# Altium PCB PCBEj4.PcbDoc
Units mm, origin at the board's own origin, x right, y up, seen from the top; angles counter-clockwise.
Board outline 50 x 50 mm, 2 copper layers (Top Layer, Bottom Layer); 14 components, 13 nets, 52 pads, 0 vias.
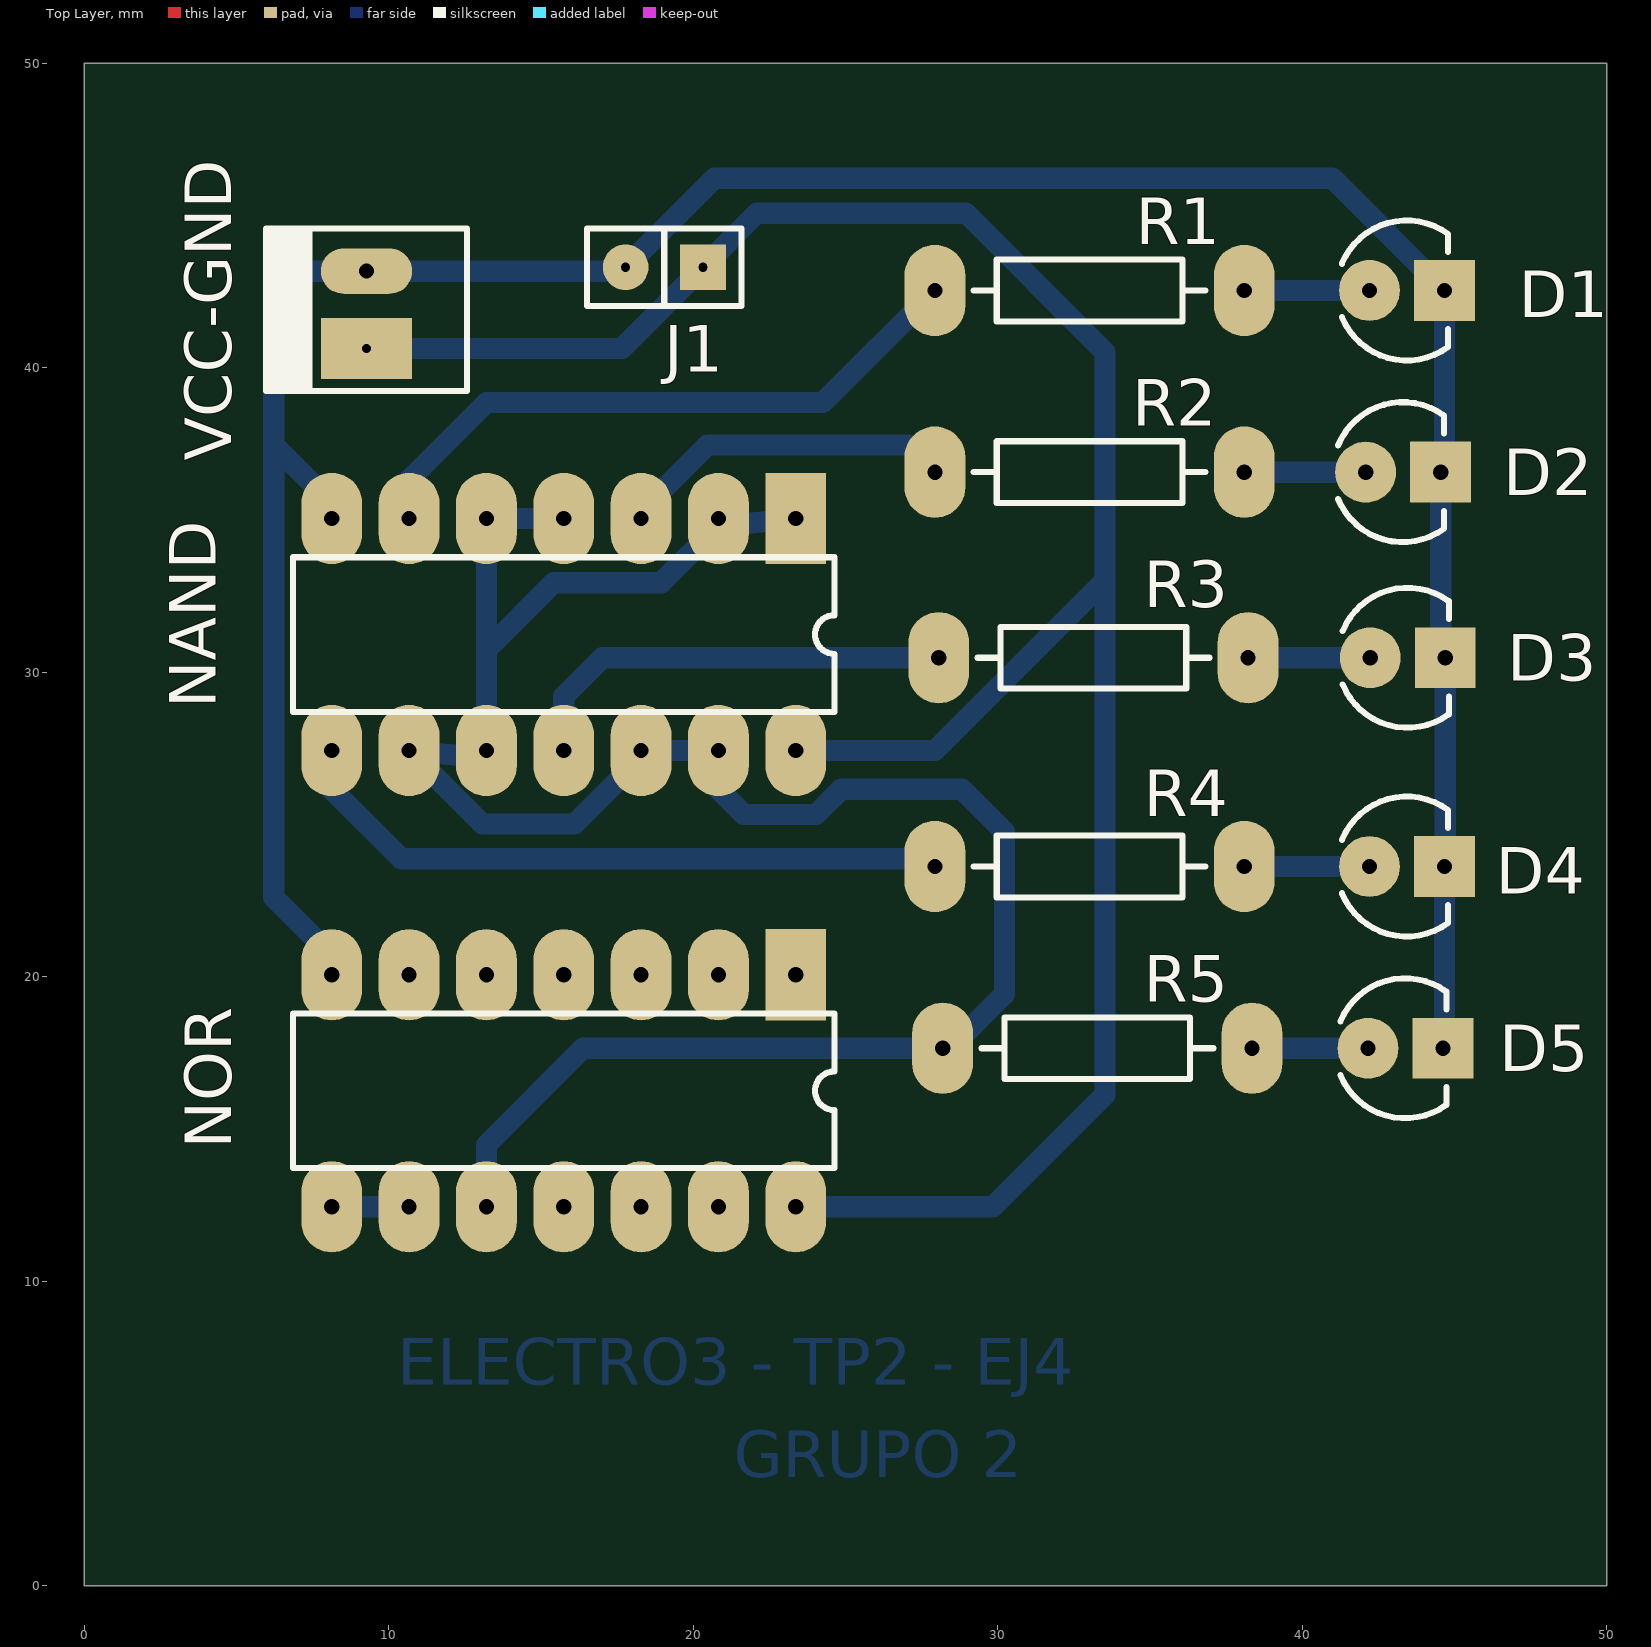
[diagram p0: Top Layer view]
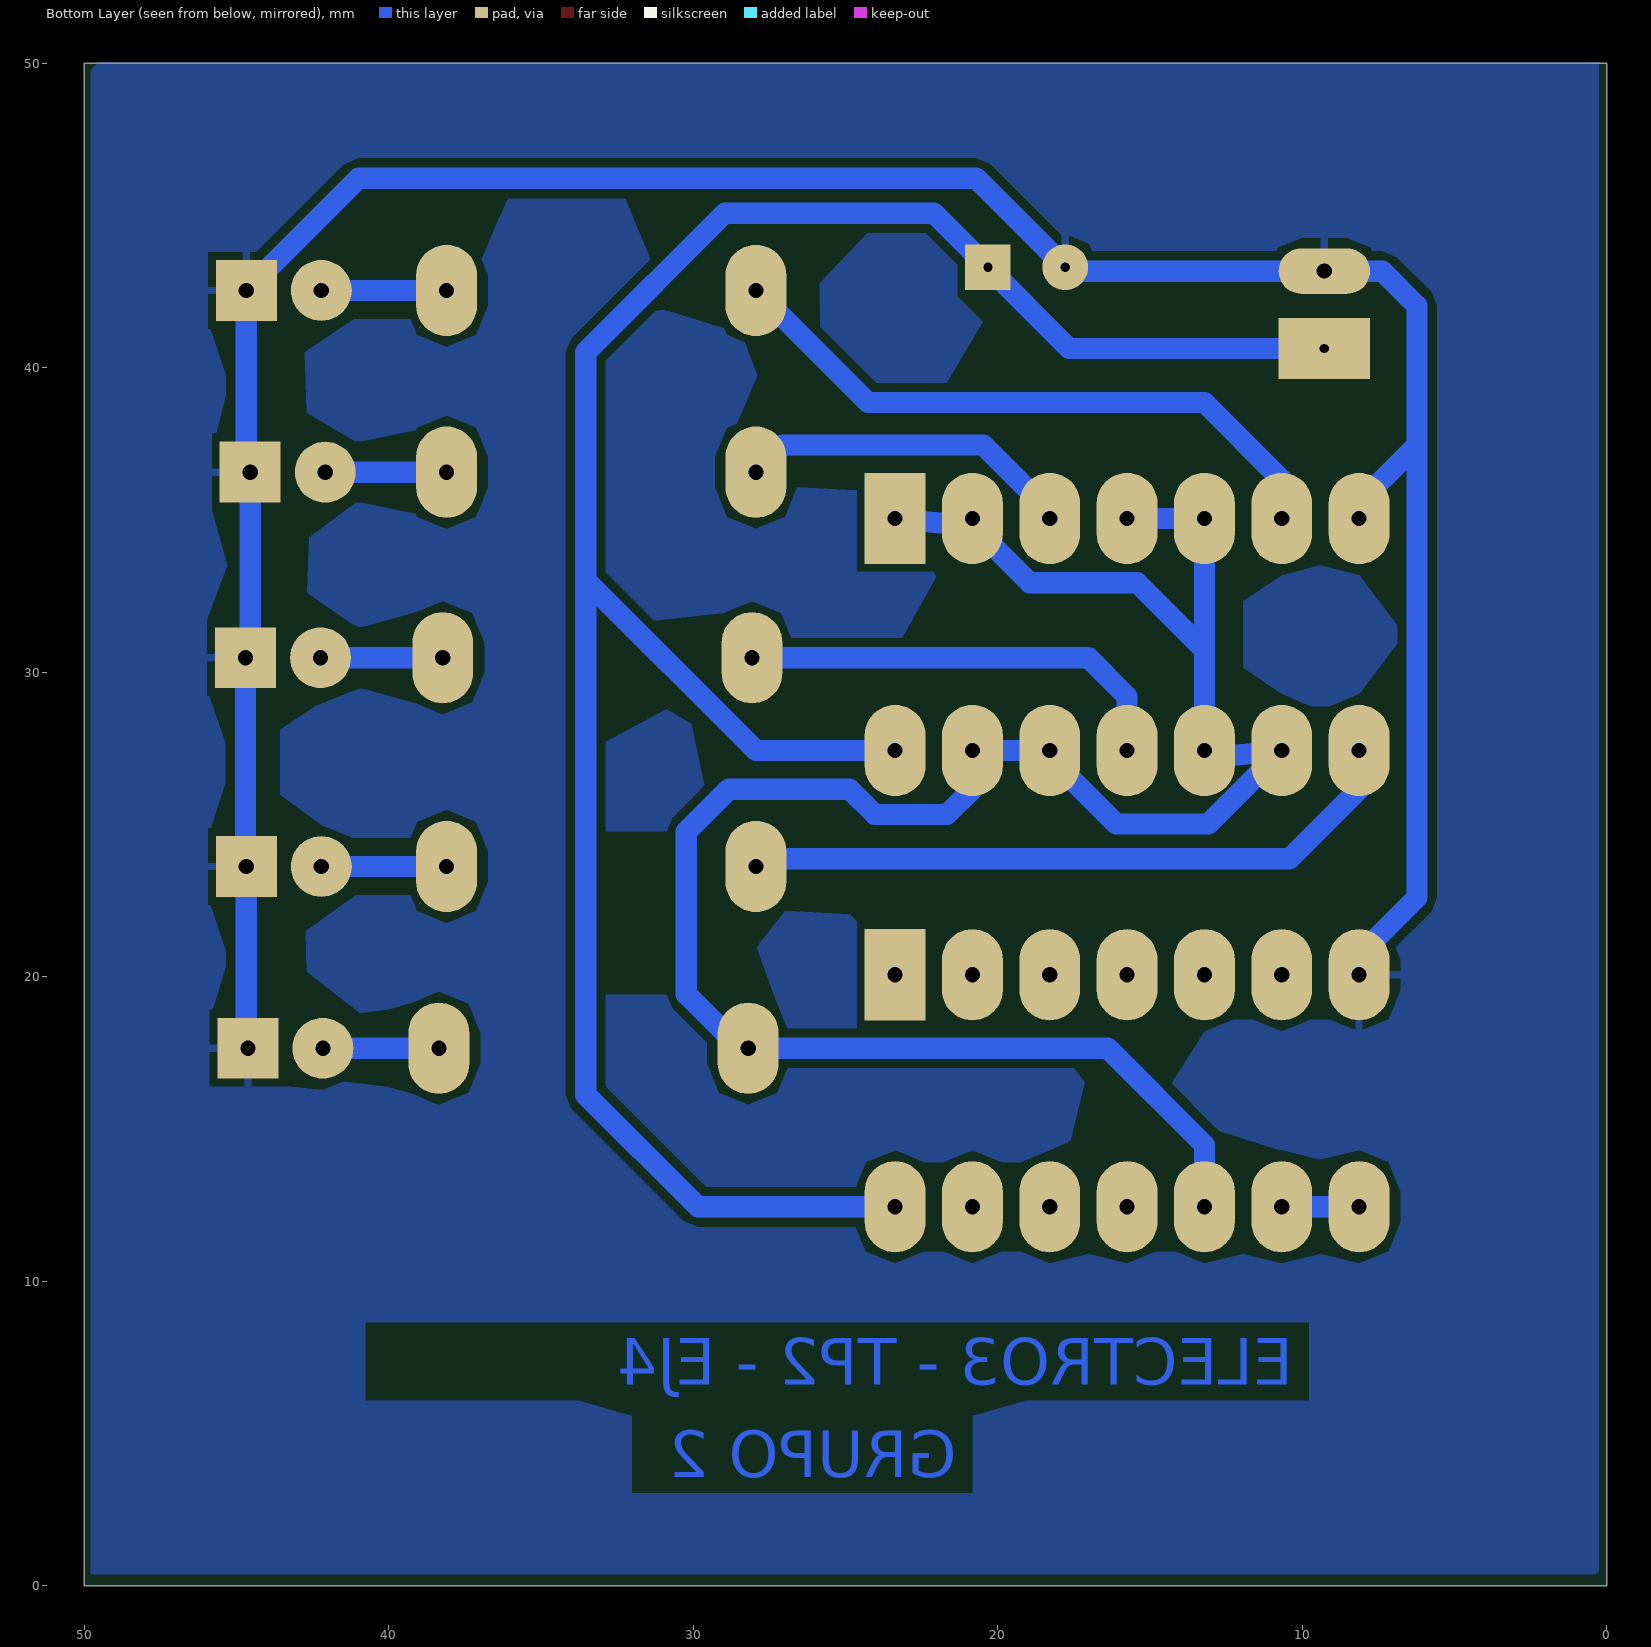
[diagram p1: Bottom Layer view, seen from below]
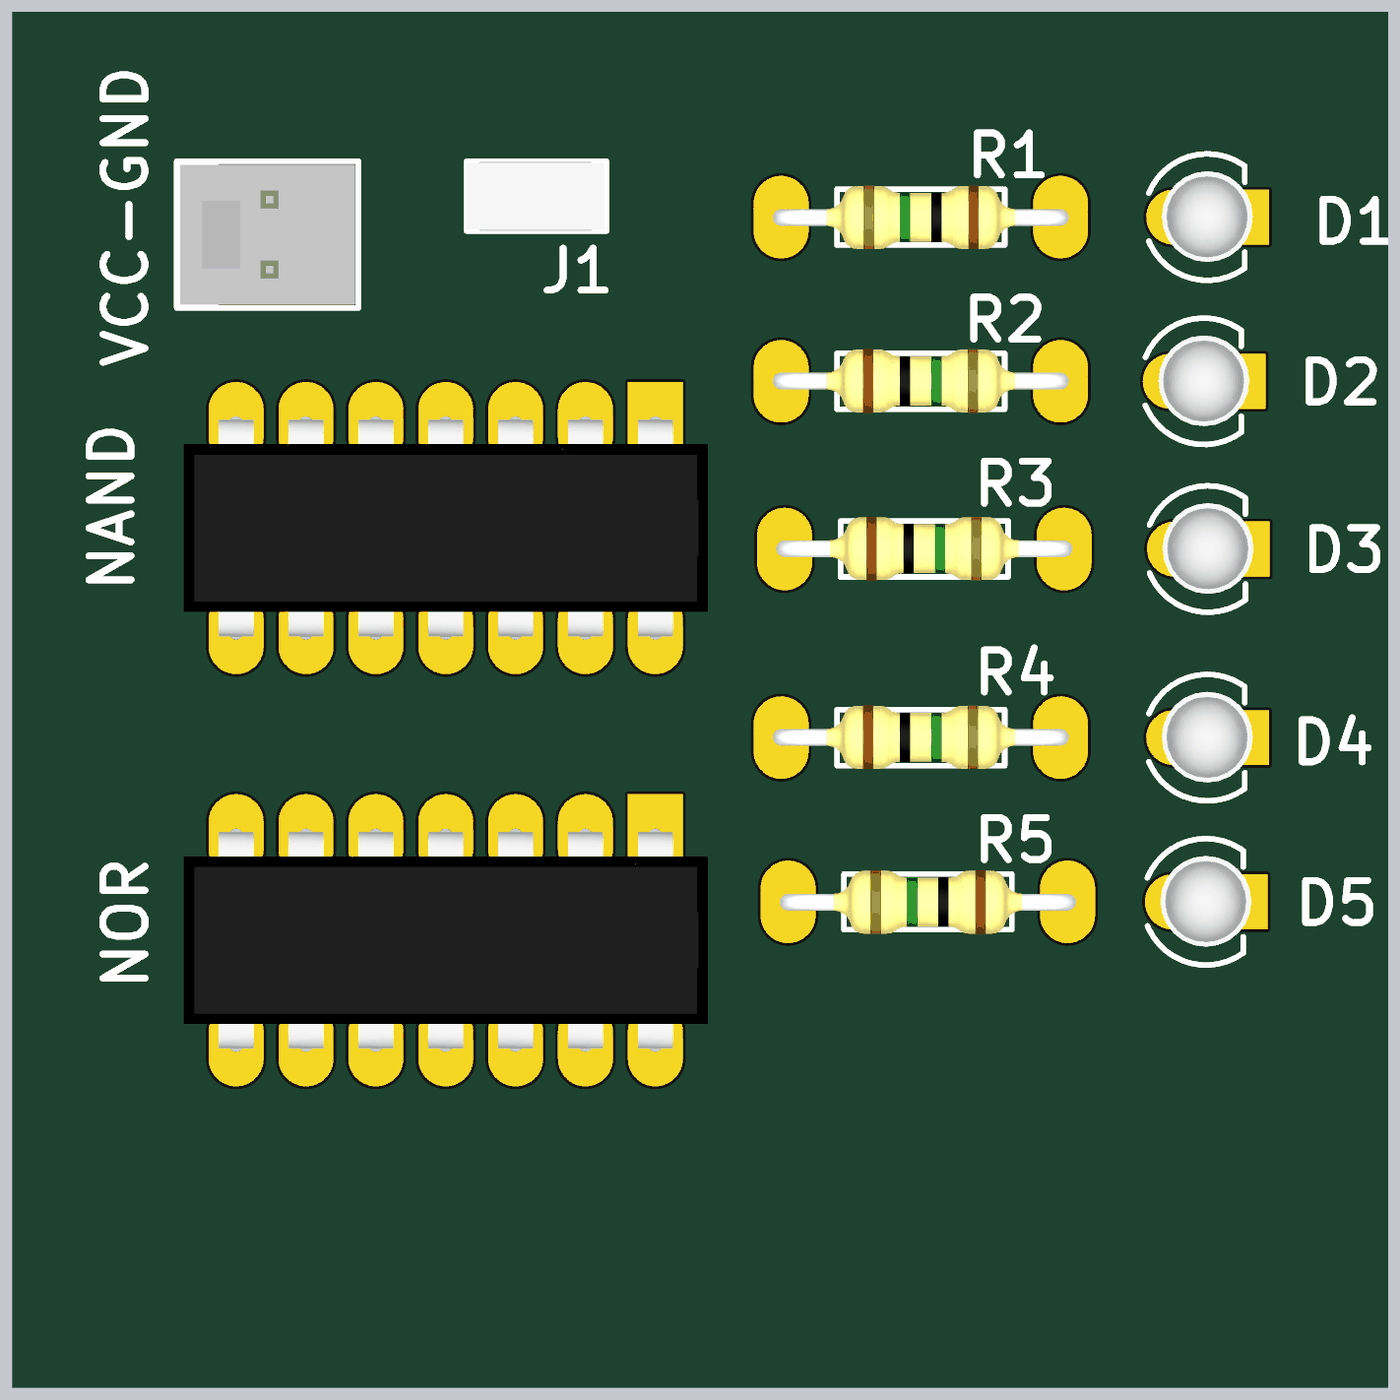
[diagram p2: 3D render of the assembled board from above, using the file's embedded part models]

## Layer stack, top to bottom
Top Solder: solder mask 0.0102, Solder Resist, Dk 3.5
Top Layer: signal copper 0.0356
Dielectric 1: dielectric 0.32, FR-4, Dk 4.8
Bottom Layer: signal copper 0.0356
Bottom Solder: solder mask 0.0102, Solder Resist, Dk 3.5

## Board outline
0,0 50,0 50,50 0,50

## Design rules (kind name [scope] priority, off if disabled: settings)
Clearance [All] p1: gap=0.254 ignorepadtopadclearanceinfootprint=FALSE except(0: Arc-Hole Track-Hole SMDPad-Hole THPad-Hole Via-Hole Fill-Hole Poly-Hole Region-Hole Text-Hole)
PolygonConnect [All] p1: connectstyle=Relief reliefconductorwidth=0.254 reliefentries=4 polygonreliefangle="90 Angle" airgapwidth=0.254
RoutingVias [All] p1: holewidth=0.3 width=2 viastyle="Through Hole" minholewidth=0.3 minwidth=2 maxholewidth=0.3 maxwidth=2
SolderMaskExpansion [All] p1: expansion=0.102
Width [All] p1: maxlimit=0.7 minlimit=0.7 preferedwidth=0.7 minimp=50.000000 maximp=50.000000 favimp=50.000000
30 further rules are at their usual default settings.

## Components (designator, comment, footprint, x,y, rotation, side; value= is the part's Value field where it differs from the comment)
D1 "LED" LED3 43.434,42.545 r0 top
D2 "LED" LED3 43.307,36.576 r0 top
D3 "LED" LED3 43.459,30.48 r0 top
D4 "LED" LED3 43.434,23.622 r0 top
D5 "LED" LED3 43.383,17.653 r0 top
J1 "JUMPER" JUMPER2 19.05,43.307 r180 top
NAND "IC_DIP14" DIP14 23.368,35.052 r270 top
NOR "IC_DIP14" DIP14 23.368,20.066 r270 top
R1 "RES" RES400 38.1,42.545 r180 top
R2 "RES" RES400 27.94,36.576 r0 top
R3 "RES" RES400 28.067,30.48 r0 top
R4 "RES" RES400 27.94,23.622 r0 top
R5 "RES" RES400 38.354,17.653 r180 top
VCC-GND "MOLEX2" MOLEX2 9.271,40.64 r90 top

## Footprints (in the part's own frame and the unit in brackets; to place one, negate y for a bottom-side part, rotate by r counter-clockwise, add the part's x,y. Pads: shape width x height; smd on the part's side, far side on the other; paste and mask are expansions set on the pad)
DIP14 [mm]
  rect 3x2 hole 0.5: 1(0,0)
  oval 3x2 hole 0.5: 2(0,-2.54) 3(0,-5.08) 4(0,-7.62) 5(0,-10.16) 6(0,-12.7) 7(0,-15.24) 8(7.62,-15.24) 9(7.62,-12.7) 10(7.62,-10.16) 11(7.62,-7.62) 12(7.62,-5.08) 13(7.62,-2.54) 14(7.62,0)
  silkscreen extent 1.27,-16.51 6.35,1.27, body extent -0.13,-17.14 7.75,1.9, height 4.19
JUMPER2 [mm]
  rect 1.5x1.5 hole 0.3: 1(-1.27,0)
  round 1.5 hole 0.3: 2(1.27,0)
  silkscreen extent -2.54,-1.27 2.54,1.27, body extent -2.46,-1.27 2.54,1.27, height 9.5
LED3 [mm]
  round 2 hole 0.5: 1(-1.219,0)
  rect 2x2 hole 0.5: 2(1.245,0)
  silkscreen extent -2.13,-2.3 1.36,2.3, body extent -1.65,-1.63 1.65,1.66, height 0.49
MOLEX2 [mm]
  rect 2x3 hole 0.3: 1(0,0)
  oval 1.5x3 hole 0.5: 2(2.54,0)
  silkscreen extent -1.4,-3.3 3.94,3.3, body extent -1.27,-3.17 3.81,3.18, height 10.74
RES400 [mm]
  oval 2x3 hole 0.5: 1(0,0) 2(10.16,0)
  silkscreen extent 1.27,-1.02 8.89,1.02, body extent -0.3,-1.14 10.46,1.17, height 2.43

## Nets (pads, with @x,y where several pads share a name; then routed paths per layer and width w, separated by ;. In a path a pad name is that pad's centre, name@x,y a point inside that pad or via, vN(x,y) a via of type N, cw(c..) or ccw(c..) an arc to the next point about the centre after c; other vN are vias at no path point)
GND: D1.2 D2.2 D3.2 D4.2 D5.2 J1.2 NAND.7 NOR.7 VCC-GND.2 | length 92.7
  Bottom Layer w0.7: NOR.7 8.128,20.701 6.223,22.606 6.223,37.465 ; NAND.7 8.128,35.56 6.223,37.465 ; D5.2 44.679,17.704 D4.2 44.704,23.647 D3.2 44.552,30.632 D2.2 44.679,36.703 D1.2 40.996,46.228 20.701,46.228 J1.2 17.653,43.18 VCC-GND.2 7.366,43.18 6.223,42.037 6.223,37.465
NetD1_1: D1.1 R1.1 | length 4.1
  Bottom Layer w0.7: R1.1 D1.1
NetD2_1: D2.1 R2.2 | length 4
  Bottom Layer w0.7: R2.2@38.227,36.195 38.608,36.576 D2.1
NetD3_1: D3.1 R3.2 | length 4
  Bottom Layer w0.7: R3.2 D3.1
NetD4_1: D4.1 R4.2 | length 4.1
  Bottom Layer w0.7: R4.2 D4.1
NetD5_1: D5.1 R5.1 | length 3.8
  Bottom Layer w0.7: R5.1 D5.1
NetNAND_1: NAND.1 NAND.2 NAND.4 NAND.5 NAND.9 NAND.10 NAND.12 NAND.13 NOR.10 R5.2 | length 75.7
  Bottom Layer w0.7: NOR.10 13.208,14.478 16.383,17.653 R5.2 28.448,17.653 30.226,19.431 30.226,24.765 28.829,26.162 24.866,26.162 24.032,25.328 21.662,25.328 20.828,26.162 NAND.13 NAND.12 18.288,27.204 16.103,25.019 13.081,25.019 NAND.9 13.183,27.181 13.208,27.178 NAND.10 13.208,30.734 ; NAND.4 NAND.5 13.208,30.734 ; NAND.2@20.828,34.798 20.853,34.801 NAND.1 ; NAND.2 20.828,34.824 18.952,32.948 15.422,32.948 13.208,30.734
NetNAND_3: NAND.3 R2.1 | length 11.2
  Bottom Layer w0.7: NAND.3 18.288,35.28 20.473,37.465 27.051,37.465 R2.1
NetNAND_6: NAND.6 R1.2 | length 21.1
  Bottom Layer w0.7: NAND.6 10.668,36.322 13.208,38.862 24.257,38.862 R1.2
NetNAND_8: NAND.8 R4.1 | length 22.1
  Bottom Layer w0.7: NAND.8 8.128,26.162 10.414,23.876 27.686,23.876 R4.1
NetNAND_11: NAND.11 R3.1 | length 14.6
  Bottom Layer w0.7: NAND.11 15.748,29.21 17.018,30.48 R3.1
NetNOR_8: NOR.8 NOR.9 | length 2.5
  Bottom Layer w0.7: NOR.8 NOR.9
VCC: J1.1 NAND.14 NOR.14 VCC-GND.1 | length 76.5
  Bottom Layer w0.7: VCC-GND.1 17.653,40.64 J1.1 22.098,45.085 28.956,45.085 33.528,40.513 33.528,33.02 ; NOR.14 29.845,12.446 33.528,16.129 33.528,33.02 ; NAND.14 27.94,27.432 33.528,33.02
pads on no net: NOR.1 NOR.2 NOR.3 NOR.4 NOR.5 NOR.6 NOR.11 NOR.12 NOR.13

## Polygon pours and split planes (outlines as drawn)
GND on Bottom Layer (solid, pour order 2): 0.254,50.038 0.254,0.254 0.381,0.381 49.784,0.381 49.784,49.784 49.53,50.038

## Other copper
Bottom Layer:
  text "ELECTRO3 - TP2 - EJ4" at 10.287,6.604 h1.52
  text "GRUPO 2" at 21.336,3.556 h1.52